# Altium PCB PCB1.PcbDoc
Units mil, origin at the board's own origin, x right, y up, seen from the top; angles counter-clockwise.
Board outline 2755.91 x 2519.69 mil, 4 copper layers (Top Layer, Layer 1, Layer 2, Bottom Layer), stack 23.756 mil thick; 56 components, 36 nets, 149 pads, 26 vias.
Unrouted connection lines stored in the file: 21.
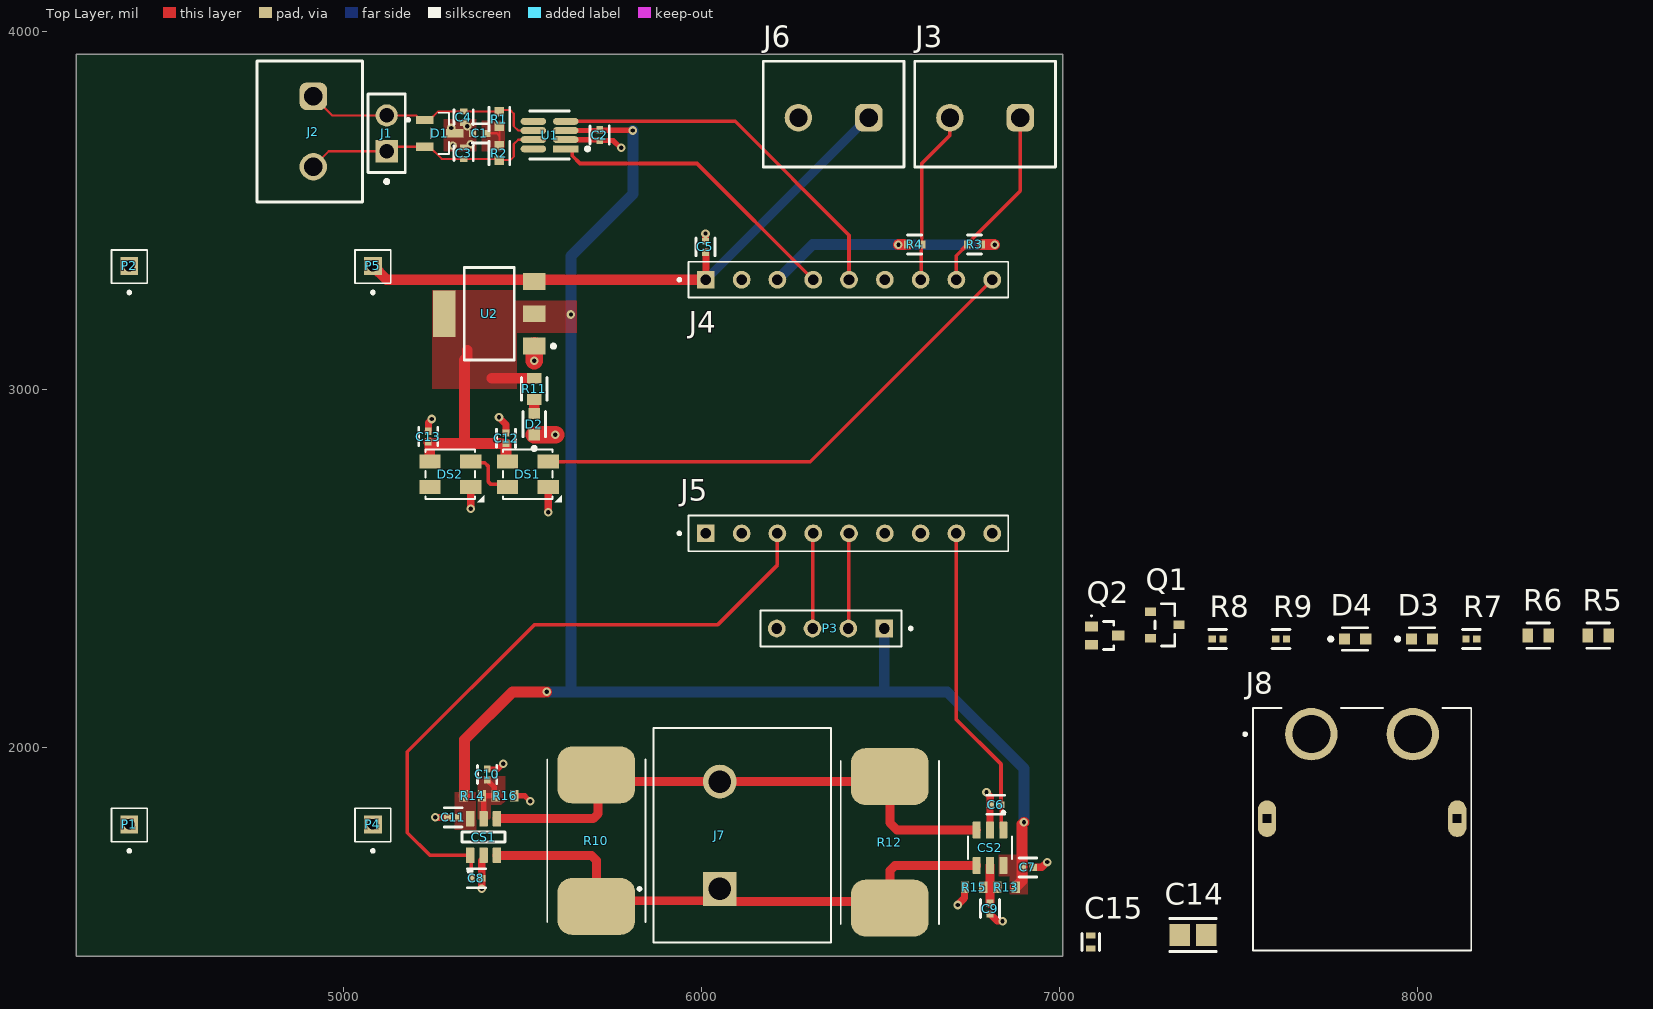
[diagram p0: Top Layer view]
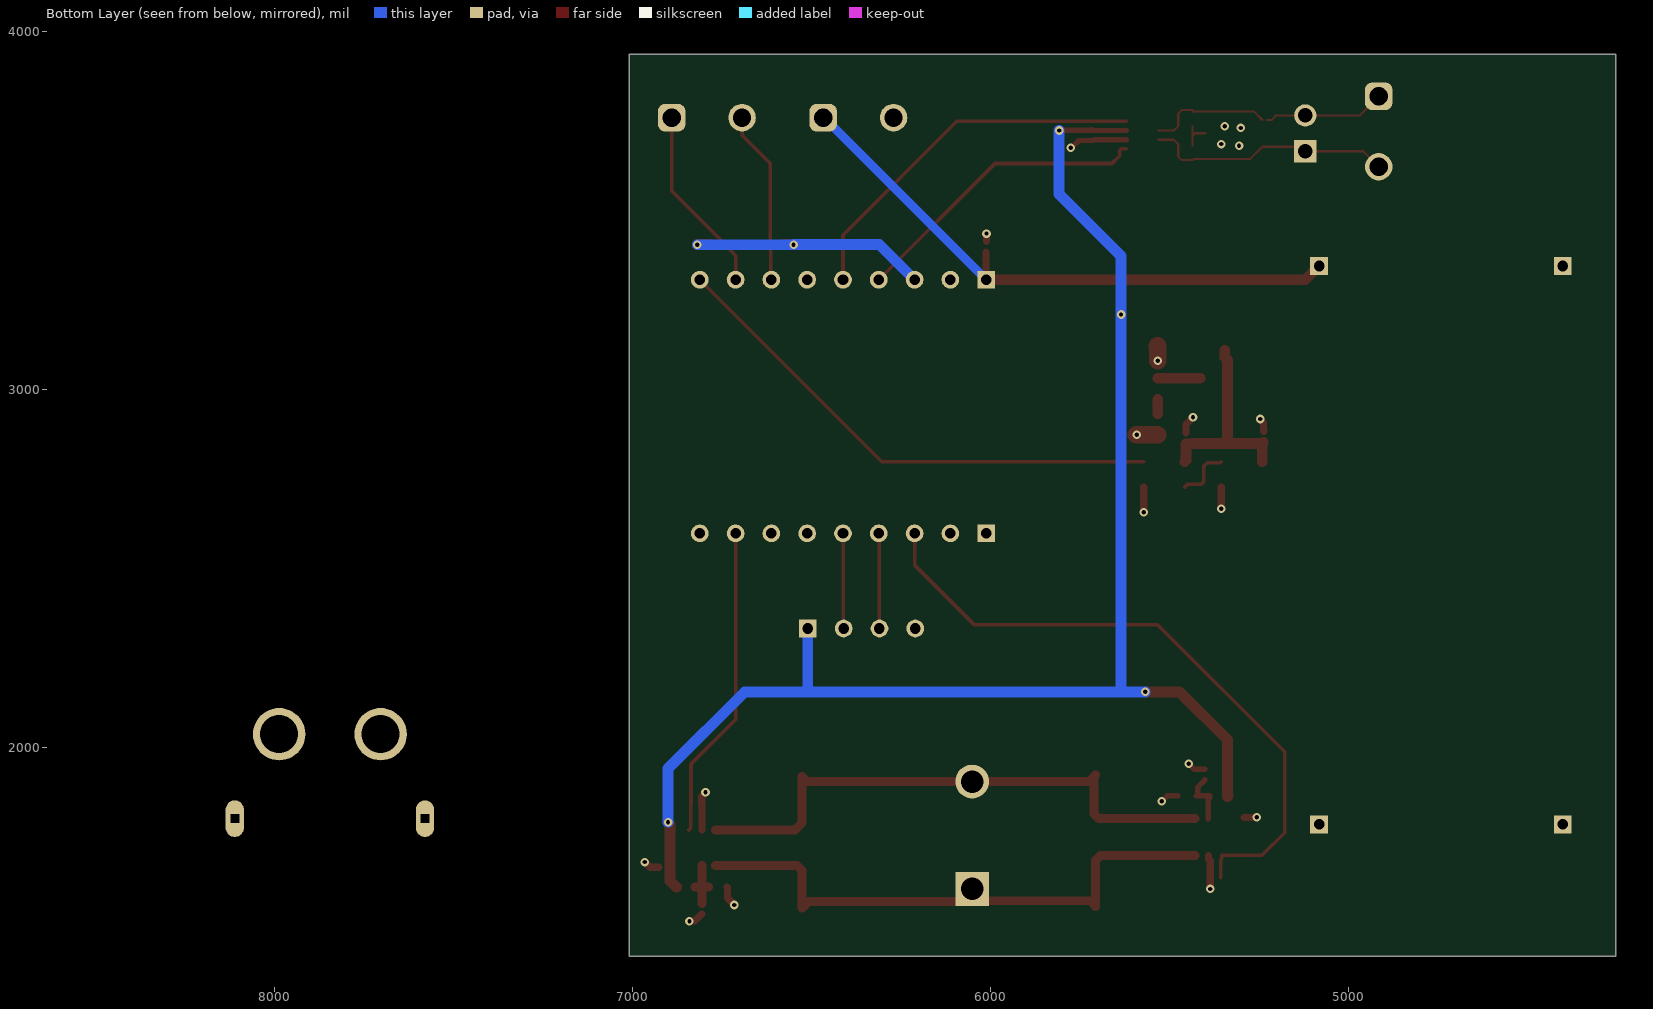
[diagram p1: Bottom Layer view, seen from below]
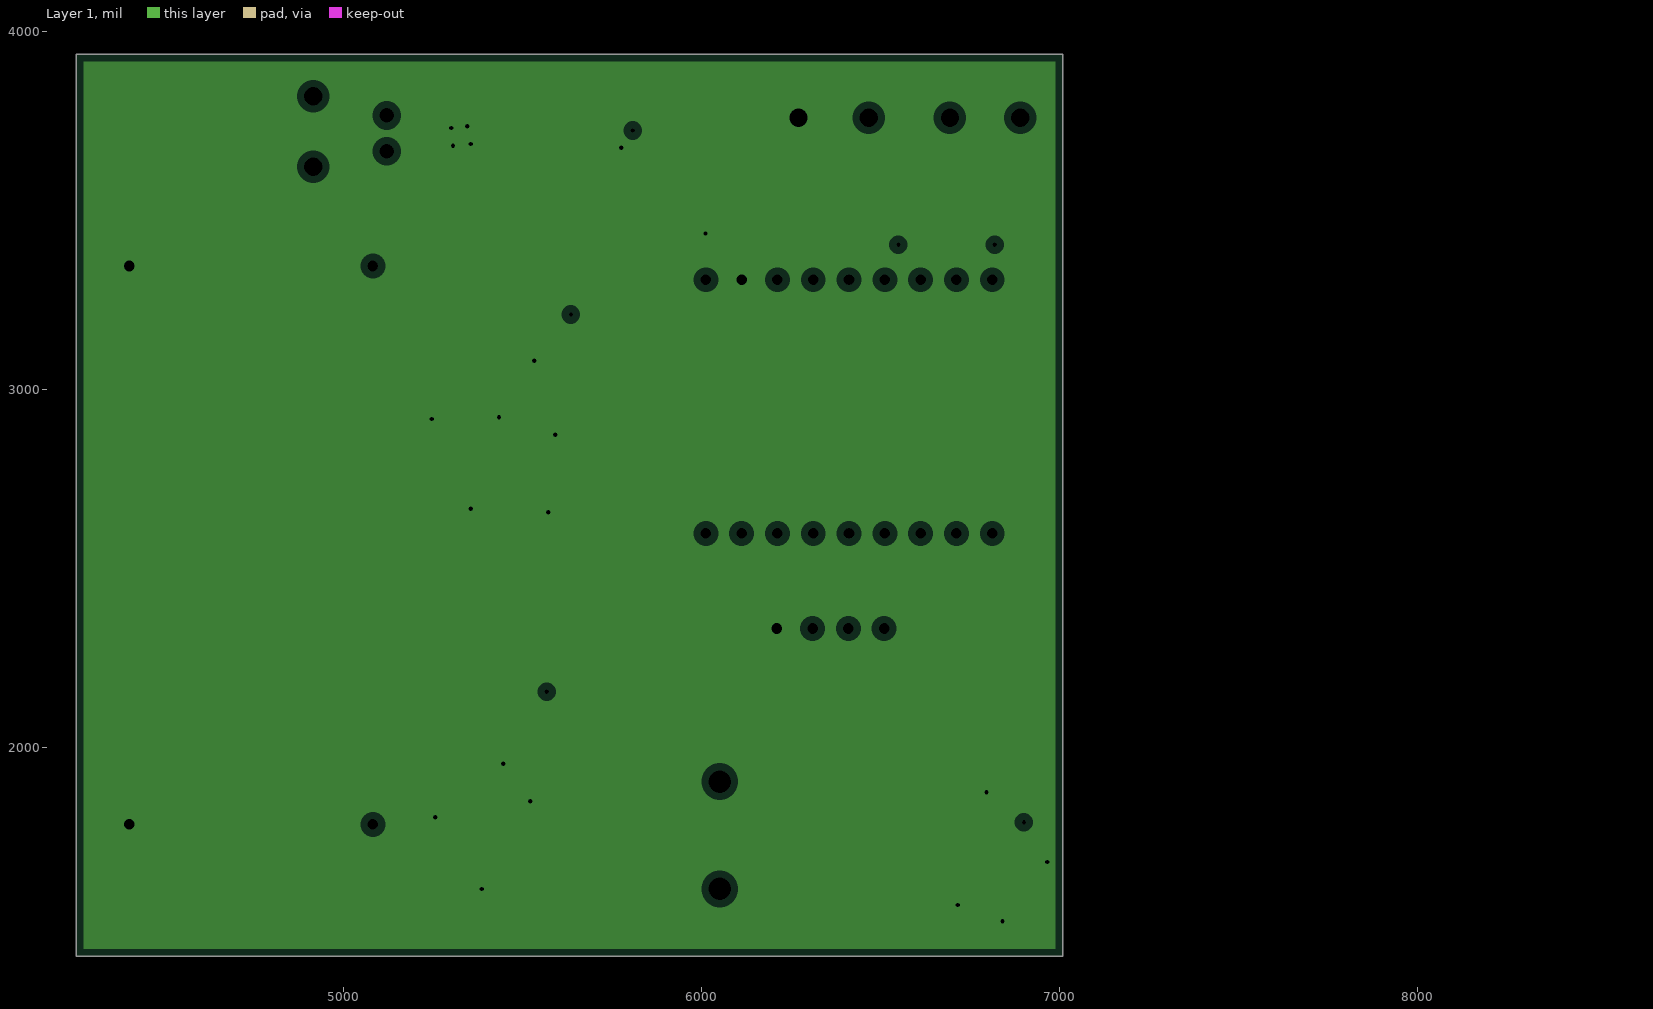
[diagram p2: Layer 1, clearances drawn from the general rule]
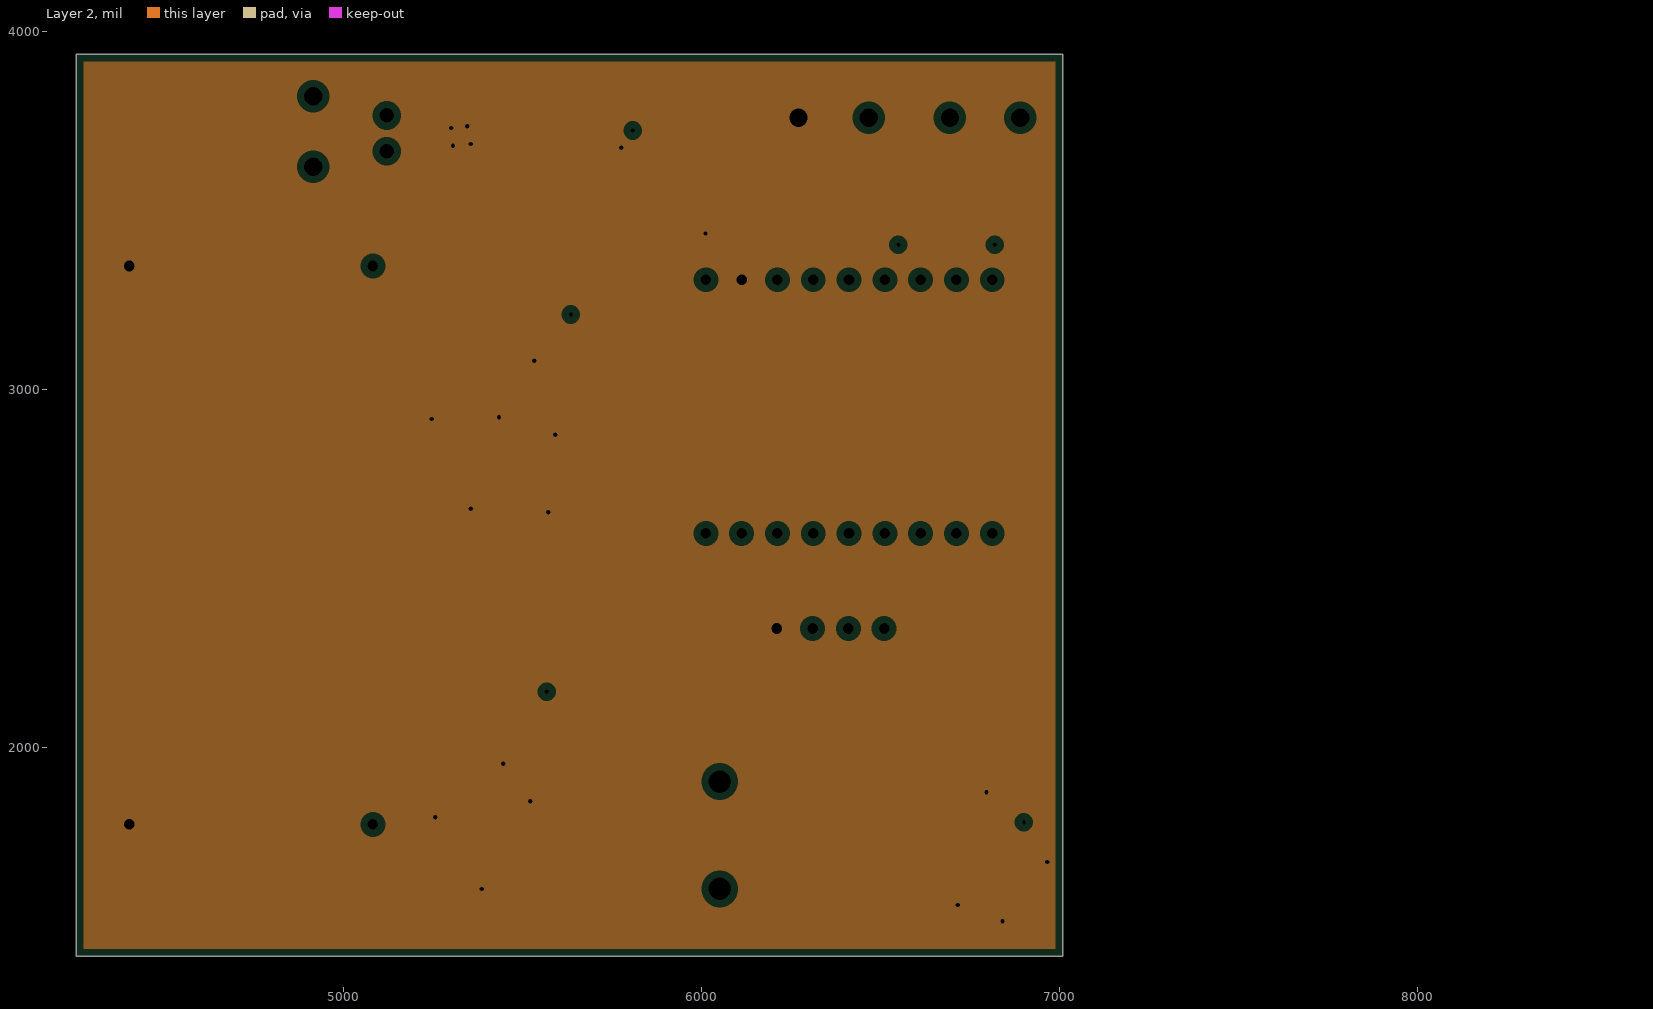
[diagram p3: Layer 2, clearances drawn from the general rule]

## Layer stack, top to bottom
Top Solder: solder mask 0.4, Solder Resist, Dk 3.5
Top Layer: signal copper 1.4
Dielectric 2: prepreg 2.8, PP-006, Dk 4.1
Layer 1: plane copper 1.378, net GND
Dielectric 1: dielectric 12.6, FR-4, Dk 4.8
Layer 2: plane copper 1.378, net GND
Dielectric 3: prepreg 2.8, PP-006, Dk 4.1
Bottom Layer: signal copper 1.4
Bottom Solder: solder mask 0.4, Solder Resist, Dk 3.5

## Board outline
4251.97,3937.01 4251.97,1417.32 7007.87,1417.32 7007.87,3937.01

## Design rules (kind name [scope] priority, off if disabled: settings)
Clearance [All] p1: gap=6 ignorepadtopadclearanceinfootprint=FALSE
DiffPairsRouting [All] p1: maxlimit=10 minlimit=10 mostfreqgap=10 toplayer_minwidth=5 toplayer_maxwidth=15 toplayer_prefwidth=15 bottomlayer_minwidth=15 bottomlayer_maxwidth=15 bottomlayer_prefwidth=15 maxuncoupledlength=500
PlaneClearance [All] p1: clearance=20
PlaneConnect [All] p1: pad.planeconnectstyle=Relief pad.reliefexpansion=20 pad.reliefentries=4 pad.reliefconductorwidth=10 pad.reliefairgap=10 via.planeconnectstyle=Direct via.reliefexpansion=20 via.reliefentries=4 via.reliefconductorwidth=10 via.reliefairgap=10
PolygonConnect [All] p1: connectstyle=Direct reliefconductorwidth=10 reliefentries=4 polygonreliefangle="90 Angle" airgapwidth=10
RoutingVias [All] p1: holewidth=12 width=24 viastyle="Through Hole" minholewidth=12 minwidth=24 maxholewidth=12 maxwidth=24
SolderMaskExpansion [All] p1: expansion=4 istentingtop=FALSE
SupplyNets "Schematic Supply Nets_5" [InNet('3V3_2')] p1: voltage=0.000
SupplyNets "Schematic Supply Nets_4" [InNet('GND')] p2: voltage=0.000
SupplyNets "Schematic Supply Nets_3" [InNet('3V3')] p3: voltage=0.000
SupplyNets "Schematic Supply Nets_2" [InNet('+5')] p4: voltage=0.000
SupplyNets "Schematic Supply Nets" [InNet('VIN')] p5: voltage=0.000
Width [All] p1: maxlimit=50 minlimit=6 preferedwidth=10
27 further rules are at their usual default settings.

## Classes and differential pairs
component class Sheet1: C12 C13 C14 C15 D2 DS1 DS2 J3 J6 J8 P1 P2 P4 P5 R3 R4 R11 U2 U3 U4
component class Sheet_1: C5 C6 C7 C8 C9 C10 C11 CS1 CS2 D3 D4 J4 J5 J7 P3 Q1 Q2 R12 R13 R14 R15 R16
component class CAN: C1 C2 C3 C4 D1 J1 J2 R1 R2 U1

## Components (designator, comment, footprint, x,y, rotation, side; value= is the part's Value field where it differs from the comment)
C1 "CC0402KRX7R6BB472" FP-CC0402-MFG 5379.33,3716.1 r0 top value="4.7 nF"
C2 "CL05B104KP5NNNC" FP-CL17-IPC_C 5714.33,3711.1 r90 top
C3 "CL05C101JB5NNNC" FP-CL05-MFG 5334.33,3660.45 r270 top value=100pF
C4 "CL05C101JB5NNNC" FP-CL05-MFG 5334.33,3761.1 r90 top value=100pF
C5 "CL05A104KA5NNNC" FP-CL278-IPC_C 6010,3399 r90 top
C6 "CL05A104KA5NNNC" FP-CL278-IPC_C 6820.59,1840 r180 top
C7 "CL05A104KA5NNNC" FP-CL278-IPC_C 6910.59,1665 r0 top
C8 "CL05A104KA5NNNC" FP-CL278-IPC_C 5370,1635 r0 top
C9 "CL05A104KA5NNNC" FP-CL278-IPC_C 6805,1550 r90 top
C10 "CL05A104KA5NNNC" FP-CL278-IPC_C 5400,1925 r270 top
C11 "CL05A104KA5NNNC" FP-CL278-IPC_C 5305,1805 r180 top
C12 "CL05A104KA5NNNC" FP-CL278-IPC_C 5452.76,2864.17 r270 top
C13 "CL05A104KA5NNNC" FP-CL278-IPC_C 5235.52,2868.81 r270 top
C14 "CL21A226MQQNNNE" FP-CL21-IPC_A 7372.03,1476.38 r0 top
C15 "CL05A106MP5NUNC" FP-CL05A106MP5NUNC-MFG 7086.6,1456.69 r90 top value=10uF
CS1 "INA181A1IDBVR" FP-DBV0006A-MFG 5390,1750 r90 top
CS2 "INA181A3IDBVR" SOT95P280X145-6N 6805,1720 r270 top
D1 "ESD2CAN24DBZRQ1" SOT95P237X112-3N 5267.8,3716.1 r0 top
D2 "VLMS1300-GS08" FP-6_541-5092_01-4-MFG 5531.5,2903.54 r90 top
D3 "VLMS1300-GS08" FP-6_541-5092_01-4-MFG 8011.8,2303.14 r0 top
D4 "VLMS1300-GS08" FP-6_541-5092_01-4-MFG 7824.79,2303.14 r0 top
DS1 "SK6812MINI-HS" LED 5511.81,2765.75 r0 top
DS2 "SK6812MINI-HS" LED 5295.28,2765.75 r0 top
J1 "M20-9990246" FP-M20-9990246-MFG 5119.33,3716.1 r90 top
J2 "691137710002" 691137710002 4904.33,3721.1 r270 top
J3 "691137710002" 691137710002 6791.34,3769.68 r180 top
J4 "2PH1-09-UA" "2AMPHENOL_76341-322LF - duplicate" 7061.02,3307.09 r180 top locked
J5 "2PH1-09-UA" "2AMPHENOL_76341-322LF - duplicate" 7061.02,2598.43 r180 top locked
J6 "691137710002" 691137710002 6368.11,3769.68 r180 top
J7 "TB005-762-02BE" CUI_TB005-762-02BE 6050,1605 r90 top
J8 "XT60PW-F" AMASS_XT60PW-F 7844.47,2037.4 r0 top
P1 "Header-Male-2.54_1x1" PCBCOMPONENT_1 4400.26,1785.24 r270 top
P2 "Header-Male-2.54_1x1" PCBCOMPONENT_1 4400.26,3345.47 r270 top
P3 "Header-Female-2.54_1x4" "4 PIN CONNECTOR MALE" 5609.06,2177.68 r0 top
P4 "Header-Male-2.54_1x1" PCBCOMPONENT_1 5080.83,1785.24 r270 top
P5 "Header-Male-2.54_1x1" PCBCOMPONENT_1 5080.83,3345.47 r270 top
Q1 "SS8050-G" FP-SS8050-G-MFG 7293.29,2342.51 r0 top
Q2 "SMMBT3906WT1G" ONSC-SC-70-3-419-04_V 7125.97,2312.99 r0 top
R1 "ERJ-2RKF60R4X" FP-ERJ2RK-IPC_A 5434.33,3756.1 r270 top
R2 "ERJ-2RKF60R4X" FP-ERJ2RK-IPC_A 5434.33,3661.1 r90 top
R3 "RC0402JR-074K7L" FP-RC0402-0_4-MFG 6761.81,3405.51 r0 top
R4 "RC0402JR-074K7L" FP-RC0402-0_4-MFG 6594.49,3405.51 r180 top
R5 "CRCW06031K00FKEA" FP-CRCW0603-e3-MFG 8503.92,2312.99 r0 top value=1kR
R6 "CRCW06031K00FKEA" FP-CRCW0603-e3-MFG 8336.6,2312.99 r0 top value=1kR
R7 "RC0402JR-0710KL" FP-RC0402-0_4-IPC_C 8149.59,2303.14 r0 top
R8 "RC0402JR-0710KL" FP-RC0402-0_4-IPC_C 7440.93,2303.14 r0 top
R9 "RC0402JR-0710KL" FP-RC0402-0_4-IPC_C 7618.1,2303.14 r0 top
R10 "WSR32L000FEA" RESM11569X253N 5705,1740 r90 top value=2mR
R11 "CRCW06031K00FKEA" FP-CRCW0603-e3-MFG 5531.5,3001.97 r90 top value=1kR
R12 "WSR32L000FEA" RESM11569X253N 6525,1735 r90 top value=2mR
R13 "RC0603FR-1010KL" RESC1608X55X25LL10T15 6850.59,1610 r0 top
R14 "RC0603FR-1010KL" RESC1608X55X25LL10T15 5360,1865 r180 top
R15 "RC0603FR-1010KL" RESC1608X55X25LL10T15 6760.59,1610 r0 top
R16 "RC0603FR-1010KL" RESC1608X55X25LL10T15 5450,1865 r180 top
U1 "TCAN332GDCNR" FP-DCN0008A-IPC_A 5574.33,3711.1 r180 top
U2 "AZ1117CH-3.3TRG1" FP-SOT223-MFG 5406,3212 r180 top

## Footprints (in the part's own frame and the unit in brackets; to place one, negate y for a bottom-side part, rotate by r counter-clockwise, add the part's x,y. Pads: shape width x height; smd on the part's side, far side on the other; paste and mask are expansions set on the pad)
"2AMPHENOL_76341-322LF - duplicate" [mm]
  rect 1.258x1.258 / inner round 1.258 / far side rect 1.258x1.258 hole 0.75: 1(26.67,0)
  round 1.258 hole 0.75: 2(24.13,0) 3(21.59,0) 4(19.05,0) 5(16.51,0) 6(13.97,0) 7(11.43,0) 8(8.89,0) 9(6.35,0)
  silkscreen extent 5.21,-1.27 28.65,1.27
"4 PIN CONNECTOR MALE" [mil]
  rect 49.53x49.53 / inner round 49.53 / far side rect 49.53x49.53 hole 29.53: 1(900,155)
  round 49.53 hole 29.53: 2(800,155) 3(700,155) 4(600,155)
  silkscreen extent 555,105 978,205
691137710002 [mm] "Horizontal Cable Entry with Pressure Clamp, pitch 5mm, 02p"
  rrect50% 1.95x1.95 hole 1.3: 1(-2.5,0.25)
  round 1.95 hole 1.3: 2(2.5,0.25)
  silkscreen extent -5,-3.75 5,3.75, body extent -5,-3.75 5,3.75, height 11.6
AMASS_XT60PW-F [mm]
  round 3.716 hole 2.7: 1(-3.6,0) 2(3.6,0)
  oval 1.3x2.6 hole 0.6 square: S1(-6.75,-6) S2(6.75,-6)
  silkscreen extent -8.4,-15.35 7.75,1.85, body extent -7.75,-15.35 7.75,1.85, height 8.4
CUI_TB005-762-02BE [mm]
  rect 2.4x2.4 / inner round 2.4 / far side rect 2.4x2.4 hole 1.6: 1(0,0)
  round 2.4 hole 1.6: 2(7.62,0)
  silkscreen extent -3.81,-7.9 11.43,5.8, body extent -4.32,-7.7 11.52,4.9, height 21.7
FP-6_541-5092_01-4-MFG [mm]
  rect 0.8x0.8 smd paste+0 mask+0: 1(-0.75,0) 2(0.75,0)
  silkscreen extent -1.85,-0.8 0.9,0.8, body extent -1.25,-0.6 1.25,0.6, height 0.25
FP-CC0402-MFG [mm]
  rect 0.5x0.5 smd paste+0 mask+0: 1(-0.5,0) 2(0.5,0)
  silkscreen extent -0.53,-0.68 0.53,0.67, body extent -0.87,-0.48 0.87,0.48, height 0.25
FP-CL05-MFG [mm]
  rect 0.42x0.525 smd paste+0 mask+0: 1(-0.397,0) 2(0.397,0)
  silkscreen extent -0.53,-0.67 0.53,0.67, body extent -0.71,-0.38 0.71,0.38, height 0.25
FP-CL05A106MP5NUNC-MFG [mm]
  rect 0.45x0.675 smd paste+0 mask+0: 1(-0.463,0) 2(0.463,0)
  silkscreen extent -0.6,-0.63 0.6,0.63, body extent -0.79,-0.45 0.79,0.45, height 0.25
FP-CL17-IPC_C [mil]
  rect 20.29x18.6 smd paste+0 mask+0: 1(-14.9,0) 2(14.9,0)
  silkscreen extent -25,-27 25,27, body extent -29,-15 29,15, height 10
FP-CL21-IPC_A [mil]
  rect 57.27x61.27 smd paste+0 mask+0: 1(-36.45,0) 2(36.45,0)
  silkscreen extent -65,-46 65,46, body extent -85,-50 85,50, height 10
FP-CL278-IPC_C [mil]
  rect 20.29x18.6 smd paste+0 mask+0: 1(-14.9,0) 2(14.9,0)
  silkscreen extent -25,-27 25,27, body extent -29,-15 29,15, height 10
FP-CRCW0603-e3-MFG [mm]
  rect 0.75x1 smd paste+0 mask+0: 1(-0.75,0) 2(0.75,0)
  silkscreen extent -0.8,-0.9 0.8,0.9, body extent -1.22,-0.6 1.22,0.6, height 0.25
FP-DBV0006A-MFG [mm]
  rrect17% 1.1x0.6 smd paste+0 mask+0: 1(-1.3,0.95) 2(-1.3,0) 3(-1.3,-0.95) 4(1.3,-0.95) 5(1.3,0) 6(1.3,0.95)
  silkscreen extent -2.52,-1.53 0.35,1.53, body extent -1.95,-1.78 1.95,1.78, height 0.25
FP-DCN0008A-IPC_A [mm]
  rect 1.805x0.495 smd paste+0 mask+0: 1(-1.15,0.975)
  rrect100% 1.805x0.495 smd paste+0 mask+0: 2(-1.15,0.325) 3(-1.15,-0.325) 4(-1.15,-0.975) 5(1.15,-0.975) 6(1.15,-0.325) 7(1.15,0.325) 8(1.15,0.975)
  silkscreen extent -2.83,-1.7 1.4,1.7, body extent -2.55,-1.95 2.55,1.95, height 0.25
FP-ERJ2RK-IPC_A [mil]
  rect 26.31x26.48 smd paste+0 mask+0: 1(-19.77,0) 2(19.77,0)
  silkscreen extent -33,-29 33,29, body extent -41,-21 41,21, height 10
FP-M20-9990246-MFG [mm]
  rect 1.57x1.57 hole 1.02 paste-2539.97 mask+0: 1(-1.27,0)
  round 1.57 hole 1.02 paste-2539.97 mask+0: 2(1.27,0)
  silkscreen extent -3.55,-1.32 2.79,1.32, body extent -2.89,-1.42 2.89,1.42, height 0.25
FP-RC0402-0_4-IPC_C [mil]
  rect 20.29x18.6 smd paste+0 mask+0: 1(-14.9,0) 2(14.9,0)
  silkscreen extent -25,-27 25,27, body extent -29,-15 29,15, height 10
FP-RC0402-0_4-MFG [mm]
  rect 0.5x0.6 smd paste+0 mask+0: 1(-0.5,0) 2(0.5,0)
  silkscreen extent -0.5,-0.67 0.5,0.67, body extent -0.85,-0.4 0.85,0.4, height 0.25
FP-SOT223-MFG [mm]
  rect 1.6x1.2 smd paste+0 mask+0: 1(-3.2,2.3) 2(-3.2,0) 3(-3.2,-2.3)
  rect 1.6x3.3 smd paste+0 mask+0: 4(3.2,0)
  silkscreen extent -4.68,-3.27 1.78,3.27, body extent -4.1,-3.37 4.1,3.37, height 0.25
FP-SS8050-G-MFG [mm]
  rect 0.8x0.6 smd paste+0 mask+0: 1(-1.01,0.95) 2(-1.01,-0.95) 3(1.01,0)
  silkscreen extent -0.7,-1.5 0.7,1.5, body extent -1.51,-1.6 1.51,1.6, height 0.25
LED [mm]
  rect 1.5x1 smd: 1(1.491,-0.96) 2(1.491,0.841) 3(-1.409,0.841) 4(-1.409,-0.96)
  silkscreen extent -1.71,-2.03 2.46,1.69, body extent -1.72,-1.8 1.98,1.7, height 1
ONSC-SC-70-3-419-04_V [mm] "SOT23, 3-Leads, Body 2x1.25mm, Pitch 0.65mm"
  rect 0.9x0.7 smd: 1(-0.95,0.65) 2(-0.95,-0.65) 3(0.95,0)
  silkscreen extent -1,-1 0.63,1.45, body extent -0.63,-1 0.63,1, height 1
PCBCOMPONENT_1 [mm]
  rect 1.258x1.258 / inner round 1.258 / far side rect 1.258x1.258 hole 0.75: 1(0,0)
  silkscreen extent -1.14,-1.27 1.98,1.27
RESC1608X55X25LL10T15 [mm] "Chip Resistor, 2-Leads, Body 1.60x0.80mm, IPC High Density"
  rect 0.6x0.8 smd: 1(-0.65,0) 2(0.65,0)
  body extent -0.85,-0.45 0.85,0.45, height 0.55
RESM11569X253N [mm]
  rrect50% 4.04x5.51 smd: 1(-4.665,0) 2(4.665,0)
  silkscreen extent -5.78,-3.49 5.78,3.49, body extent -5.78,-3.56 5.78,3.42, height 2.42
SOT95P237X112-3N [mm]
  rect 1.24x0.59 smd: 1(-1.055,0.95) 2(-1.055,-0.95) 3(1.055,0)
  silkscreen extent -2.35,-1.46 0.65,1.46, body extent -1.18,-1.46 1.18,1.46, height 1.12
SOT95P280X145-6N [mm]
  rrect25% 1.21x0.58 smd: 1(-1.255,0.95) 2(-1.255,0) 3(-1.255,-0.95) 4(1.255,-0.95) 5(1.255,0) 6(1.255,0.95)
  silkscreen extent -2.6,-1.56 0.8,1.56, body extent -1.4,-1.45 1.4,1.45, height 1.45

## Part data
C1: library part CMP-03422-001343-1, "CC0402 4.7 nF X7R 10.00% 10 V", Capacitance="4.7 nF", Manufacturer=YAGEO, Package=CC0402, Temperature="-55°C to +125°C", Temperature Characteristic=X7R, Temperature Coefficient=30ppm/°C, Temperature Range High=+125°C, Temperature Range Low=-55°C, Tolerance=0.1, Voltage Rating="10 V", Automotive=No, Automotive Grade=NA, Category=Cap, ComponentLink2Description=Datasheet, ComponentLink2URL=http://www.yageo.com/documents/recent/UPY-GP_NP0_16V-to-50V_16.pdf, Device Class L1="Passive Components", Device Class L2=Capacitors, Device Class L3="Ceramic Capacitors", Footprint Url=http://www.yageo.com/exep/pages/download/literatures/UPY-C_GEN_24.pdf, Height=0.55mm, Ipc Land Pattern Name=CAPC10050X50, Lead Free=Yes, Manufacturer Part Number=CC0402KRX7R6BB472, Material=Ceramic, Mouser Description="Cap Ceramic 0.0047uF 10V X7R 10% SMD 0402 125°C Paper T/R", Octopart=https://octopart.com/cc0402krx7r6bb472-yageo-90326733, RoHS=TRUE
C2: library part CMP-13271-001069-1, "Cap Ceramic 100nF 10V X7R ±10% SMD 0402 +125°C Paper T/R", Capacitance=100nF, Case Code (Imperial)=0402, Case Code (Metric)=1005, Dielectric=X7R, Max Operating Temperature=125°C, Min Operating Temperature=-55°C, Package Quantity=1, Tolerance=10%, Voltage Rating=10V, Case/Package=0402, Contact Plating=Tin, Depth=0.5mm, Height=0.5mm, Length=1mm, Mount="Surface Mount", Packaging="Tape and Reel", Radiation Hardening=No, Thickness=0.022inch, Width=0.02inch
C3 C4: library part CMP-13271-000010-1, "CAP CER 100PF 50V C0G/NP0 0402", Capacitance=100pF, Manufacturer=Samsung, Package=CL05, Temperature="-55°C to +125°C", Temperature Characteristic=C0G, Temperature Coefficient=30ppm/°C, Temperature Range High=+125°C, Temperature Range Low=-55°C, Tolerance=5%, Voltage Rating=50V, Automotive=No, Category=Cap, ComponentLink2Description=Datasheet, ComponentLink2URL=http://www.samsungsem.com/global/front/downloadcms.do?path=%2F%2Fglobal%2F%2Fsupport%2F%2Fproduct-search%2F%2Fmlcc%2F%2F__icsFiles%2F%2Fafieldfile%2F%2F2019%2F%2F06%2F%2F18&fileName=CL05C101JB5NNNC-19.pdf, Device Class L1="Passive Components", Device Class L2=Capacitors, Device Class L3="Ceramic Capacitors", Digikey Description="CAP CER 100PF 50V C0G/NP0 0402", Height=0.55mm, Ipc Land Pattern Name=CAPC10050X50, Lead Free=Yes, Manufacturer Part Number=CL05C101JB5NNNC, Material=Ceramic, Octopart=https://octopart.com/cl05c101jb5nnnc-samsung-9299367, RoHS=TRUE
C5 C6 C7 C8 C9 C10 C11 C12 C13: library part CMP-13271-000728-1, "Cap Ceramic 100nF 25V X5R ±10% SMD 0402 +85°C Paper T/R", Capacitance=100nF, Case Code (Imperial)=0402, Case Code (Metric)=1005, Dielectric=X5R, Max Operating Temperature=85°C, Min Operating Temperature=-55°C, Package Quantity=1, Tolerance=10%, Voltage=25V, Case/Package=0402, Depth=0.5mm, Height=0.5mm, Lead Free="Lead Free", Length=1mm, Mount="Surface Mount", Packaging="Tape and Reel", Radiation Hardening=No, Thickness=0.022inch, Voltage Rating=25V, Voltage Rating (DC)=25V, Width=0.02inch
C14: library part CMP-13271-000185-1, "CL21 Series 0805 22uF 6.3V ±20% Tolerance X5R Multilayer Ceramic Chip Capacitor", Capacitance=22uF, Case Code (Imperial)=0805, Case Code (Metric)=2012, Dielectric=X5R, Max Operating Temperature=85°C, Min Operating Temperature=-55°C, Package Quantity=2000, Tolerance=20%, Voltage Rating=6.3V, Case/Package=0805, Contact Plating=Tin, Depth=1.25mm, Height=1.25mm, Lead Free="Lead Free", Length=2mm, Mount="Surface Mount", Packaging="Tape and Reel", Radiation Hardening=No, Thickness=0.055inch, Voltage Rating (DC)=6.3V, Width=0.049inch
C15: library part CMP-13271-000002-1, "CAP CER 10UF 10V X5R 0402", Capacitance=10uF, Manufacturer=Samsung, Temperature="-55°C to +85°C", Temperature Characteristic=X5R, Temperature Coefficient=15%, Temperature Range High=+85°C, Temperature Range Low=-55°C, Tolerance=20%, Voltage Rating=10V, Automotive=No, Category=Cap, ComponentLink2Description=Datasheet, ComponentLink2URL=http://www.samsungsem.com/kr/support/product-search/mlcc/__icsFiles/afieldfile/2019/05/10/19-CL05A106MP5NUNC.pdf, Device Class L1="Passive Components", Device Class L2=Capacitors, Device Class L3="Ceramic Capacitors", Digikey Description="CAP CER 10UF 10V X5R 0402", Height=0.7mm, Ipc Land Pattern Name=CAPC10050X50, Lead Free=Yes, Manufacturer Part Number=CL05A106MP5NUNC, Material=Ceramic, Octopart=https://octopart.com/cl05a106mp5nunc-samsung-22457395, Package=CL05A106MP5NUNC, RoHS=TRUE
CS1: library part CMP-04895-000055-1, "IC CURR SENSE 1 CIRCUIT SOT23-6", Ambient Temperature Range High=+125°C, Ambient Temperature Range Low=-40°C, Input Bias Current=75uA, Input Offset Voltage=0.1mV, Manufacturer="Texas Instruments", Max Junction Temp=+150°C, Max Supply Voltage=5.5V, Min Supply Voltage=2.7V, Nominal Supply Current=195uA, Output Current Per Channel=8mA, Package=DBV0006A, Temperature="-40°C to +125°C", Voltage Gain=0.02V/mV, Automotive=No, Bandwidth=350kHz, Category=IC, ComponentLink2Description=Datasheet, ComponentLink2URL=http://www.ti.com/lit/ds/symlink/ina181.pdf, Device Class L1="Integrated Circuits (ICs)", Device Class L2="Linear ICs", Device Class L3=Instrumentation, Digikey Description="IC CURR SENSE 1 CIRCUIT SOT23-6", Height=1.45mm, Lead Free=Yes, Manufacturer Part Number=INA181A1IDBVR, Mouser Description="26V bi-directional current sense amplifier for cost-sensitive systems 6-SOT-23 -40 to 125", Number of Channels=1, Octopart=https://octopart.com/ina181a1idbvr-texas+instruments-81856289, RoHS=TRUE, Standoff Height=0mm, Temperature Range High=+125°C, Temperature Range Low=-40°C
CS2: "Operational Amplifier, 1 Func, 500uV Offset-Max, PDSO6", Average Bias Current-Max (IIB)=75uA, Case/Package=SOP, Input Offset Voltage-Max=500uV, Manufacturer="Texas Instruments", Max Operating Temperature=125°C, Min Operating Temperature=-40°C, Nominal Supply Voltage=5V, Package Body Material=Plastic, Package Shape=Rectangular, Package Style="SMALL OUTLINEMeter", Peak Reflow Temperature (Cel)=260°C, Supplier Part Number=296-47658-1-ND, Supply Voltage Limit-Max=5.5V, Temperature Grade=AUTOMOTIVE, Amplifier Type="OPERATIONAL AMPLIFIER", Category="Amplifiers - Op Amps, Buffer, Instrumentation", Channels=1, Common-mode Reject Ratio-Nom=100dB, ComponentLink1Description=https://www.ti.com:443/lit/ds/symlink/ina181.pdf?src-supplier=IHS+Markit, ComponentLink1URL=https://www.ti.com:443/lit/ds/symlink/ina181.pdf?src-supplier=IHS+Markit, ComponentLink2Description=http://www.ti.com/lit/ds/symlink/ina181.pdf?src-supplier=Digikey, ComponentLink2URL=http://www.ti.com/lit/ds/symlink/ina181.pdf?src-supplier=Digikey, JESD-30 Code=R-PDSO-G6, JESD-609 Code=e3, Manufacturer Part Number=INA181A3IDBVR, Moisture Sensitivity Level=1, Pins=6, Pricing="1=0.43, 10=0.297, 25=0.2652, 100=0.2296, 250=0.21268, 500=0.20246, 1000=0.19404 (USD)", Reach SVHC Compliant=Yes, RoHS=Yes, RoHS Compliant=Yes, Slew Rate=2V/µs, Stock=8886, Supplier=Digikey, Surface Mount=Yes, Terminal Finish=Tin, Terminal Form="Gull Wing", Terminal Position=DUAL, Unity Gain BW-Nom=350kHz
D1: "Automotive, dual, 3-pF, ±24-V, ±30-kV ESD protection diode for CAN and in-vehicle networks 3-SOT-23 -55 to 150", Manufacturer="Texas Instruments", Supplier Part Number=296-ESD2CAN24DBZRQ1CT-ND, Category="Integrated Circuits (ICs)", Manufacturer Part Number=ESD2CAN24DBZRQ1, Pricing="1=0.22, 10=0.149, 25=0.1316, 100=0.1125, 250=0.10328, 500=0.09774, 1000=0.09319 (USD)", RoHS=No, Stock=12405, Supplier=Digikey
D2 D3 D4: library part CMP-02520-000012-1, "LED RED 0603 SMD", Ambient Temperature Range High=+85°C, Ambient Temperature Range Low=-35°C, Colour=Red, Forward Current=20mA, Forward Voltage=2V, Manufacturer=Vishay, Package=6.541-5092.01-4, Power Dissipation=75mW, Reverse Voltage=5V, Temperature="-35°C to +85°C", Automotive=No, Category=Diode, ComponentLink2Description=Datasheet, ComponentLink2URL=http://www.vishay.com/docs/82437/vlmo1300.pdf, Device Class L1=Optoelectronics, Device Class L2=LEDs, Device Class L3=unset, Digikey Description="LED RED 0603 SMD", Height=1mm, Lead Free=Yes, Led Orientation="Top View", Luminous Intensity=54mcd, Manufacturer Part Number=VLMS1300-GS08, Mouser Description="Standard LEDs - SMD Super Red Clear Non-Diff", Octopart=https://octopart.com/vlms1300-gs08-vishay-21709201, Peak Emmision Wavelength=639nm, RoHS=TRUE, Temperature Range High=+85°C, Temperature Range Low=-35°C, Viewing Angle=130°, Wavelength=631nm
J1: library part CMP-15831-000009-1, "CONN HEADER VERT 2POS 2.54MM", Current Rating=3A, Manufacturer=Harwin, Temperature="-40°C to +105°C", Temperature Range High=+105°C, Temperature Range Low=-40°C, Automotive=No, Category=Conn, ComponentLink2Description=Datasheet, ComponentLink2URL=https://cdn.harwin.com/pdfs/M20-999.pdf, Conn Gender=Male, Conn Orientation=Vertical, Contact Material=Tin,Nickel, Device Class L1=Connectors, Device Class L2="Headers and Wire Housings", Device Class L3=unset, Digikey Description="CONN HEADER VERT 2POS 2.54MM", Height=8.99mm, Lead Free=Yes, Manufacturer Part Number=M20-9990246, Mouser Description="2.54mm (0.1\") Pitch SIL Vertical PC Tail Pin Header, 6.1mm mating pin height, tin, 2 contacts", Number of Contacts=2, Number of Rows=1, Octopart=https://octopart.com/m20-9990246-harwin-2590635, Package=M20-9990246, Pitch=2.54mm, RoHS=TRUE
J2 J3 J6: library part CMP-1502-03324-2, Current Rating=16A, Max Operating Temperature=120°C, Min Operating Temperature=-30°C, Voltage Rating=300V, Contact Material="Nickel, Tin", Height=11.6mm, Lead Pitch=5mm, NexarPartId=78871135, Number of Contacts=2, Number of Pins=2, Number of Rows=1, Packaging=Box, RoHS=Non-Compliant
J4 J5: "Conn Unshrouded Header HDR 9 POS 2mm Solder ST Thru-Hole", Contact Resistance=20mΩ, Current Rating=1A, Insulation Resistance=5GΩ, Manufacturer="Adam Tech", Max Operating Temperature=105°C, Min Operating Temperature=-55°C, Supplier Part Number=2057-2PH1-09-UA-ND, Category="Card Edge Connectors", ComponentLink1Description=https://datasheet.octopart.com:443/2PH1-09-UA-Adam-Tech-datasheet-21182828.pdf?src-supplier=IHS, ComponentLink1URL=https://datasheet.octopart.com:443/2PH1-09-UA-Adam-Tech-datasheet-21182828.pdf?src-supplier=IHS, ComponentLink2Description=https://datasheet.octopart.com:443/2PH1-09-UA-Adam-Tech-datasheet-12511781.pdf?src-supplier=Future+Electronics, ComponentLink2URL=https://datasheet.octopart.com:443/2PH1-09-UA-Adam-Tech-datasheet-12511781.pdf?src-supplier=Future+Electronics, ComponentLink3Description=http://sigma.octopart.com:80/rohs_statement/Adam-Tech-company-22.pdf?src-supplier=Compliance+Statements, ComponentLink3URL=http://sigma.octopart.com:80/rohs_statement/Adam-Tech-company-22.pdf?src-supplier=Compliance+Statements, ComponentLink4Description=http://sigma.octopart.com:80/reach_statement/Adam-Tech-company-23.pdf?src-supplier=Compliance+Statements, ComponentLink4URL=http://sigma.octopart.com:80/reach_statement/Adam-Tech-company-23.pdf?src-supplier=Compliance+Statements, Contact Gender=Male, Contact Material=Brass, Lead Free="Lead Free", Lifecycle Status=Production, Manufacturer Part Number=2PH1-09-UA, Number of Rows=1, Pins=9, Pricing="1=0.17, 10=0.141, 100=0.1195, 500=0.1066, 1000=0.10151, 5000=0.0906, 10000=0.08627 (USD)", REACH SVHC=Yes, RoHS=Compliant, Stock=1766, Supplier=DigiKey, Terminal Pitch=2mm
J7: "Barrier Strip Terminal Block", Manufacturer="Same Sky", Supplier Part Number=102-6189-ND, Category="Terminal Blocks", ComponentLink1Description=https://www.cuidevices.com/product/resource/digikeypdf/tb005-762.pdf?src-supplier=Digikey, ComponentLink1URL=https://www.cuidevices.com/product/resource/digikeypdf/tb005-762.pdf?src-supplier=Digikey, ComponentLink2Description=https://datasheet.octopart.com/TB005-762-02BE-Same-Sky-datasheet-182050252.pdf?src-supplier=Future+Electronics, ComponentLink2URL=https://datasheet.octopart.com/TB005-762-02BE-Same-Sky-datasheet-182050252.pdf?src-supplier=Future+Electronics, ComponentLink3Description=https://datasheet.octopart.com/TB005-762-02BE-CUI-Devices-datasheet-142371921.pdf?src-supplier=Future+Electronics, ComponentLink3URL=https://datasheet.octopart.com/TB005-762-02BE-CUI-Devices-datasheet-142371921.pdf?src-supplier=Future+Electronics, ComponentLink4Description=https://datasheet.octopart.com/TB005-762-02BE-Same-Sky-datasheet-182881445.pdf?src-supplier=Electro+Sonic, ComponentLink4URL=https://datasheet.octopart.com/TB005-762-02BE-Same-Sky-datasheet-182881445.pdf?src-supplier=Electro+Sonic, ComponentLink5Description=https://datasheet.octopart.com/TB005-762-02BE-Same-Sky-datasheet-189105715.pdf?src-supplier=Master+Electronics, ComponentLink5URL=https://datasheet.octopart.com/TB005-762-02BE-Same-Sky-datasheet-189105715.pdf?src-supplier=Master+Electronics, Manufacturer Part Number=TB005-762-02BE, Pricing="1=0.78, 10=0.574, 25=0.5, 50=0.4504, 100=0.4073, 250=0.36028, 600=0.3253, 1200=0.30358, 5400=0.27068 (USD)", RoHS=Yes, Stock=4809, Supplier=Digikey
J8: "Socket DC Supply Connector Female", Package=Package, Availability="Not in stock", Check_prices=https://www.snapeda.com/parts/XT60PW-F/AMASS/view-part/?ref=eda, MF=AMASS, MP=XT60PW-F, Price=None, SnapEDA_Link=https://www.snapeda.com/parts/XT60PW-F/AMASS/view-part/?ref=snap
P1 P2 P4 P5: JLCPCB Part Class="Extended Part", Manufacturer=BOOMELE(博穆精密), Manufacturer Part=2.54-1*1P针, spicePre=P, spiceSymbolName=Header-Male-2.54_1x1, Supplier=LCSC, Supplier Part=C81276
P3: Manufacturer=ReliaPro, Manufacturer Part=Header-Female-2.54_1x4, spicePre=P, spiceSymbolName=Header-Female-2.54_1x4, Supplier=LCSC, Supplier Part=C124413
Q1: library part CMP-20235-000001-1, "NPN TRANSISTOR 1.5A 40V SOT-23 R", Case/Package=TO-236-3, Collector Emitter Breakdown Voltage=25V, Collector Emitter Voltage (VCEO)=400mV, Max Collector Current=1.5A, Max Power Dissipation=300mW, Transition Frequency=100MHz, Max Breakdown Voltage=25V, Mount="Surface Mount", Packaging="Tape and Reel", RoHS Compliant=Yes
Q2: library part CMP-1048-00374-1, "General Purpose Transistor, PNP Silicon, 3-Pin SC70, Pb-Free, Tape and Reel", Manufacturer="On Semiconductor", ComponentLink1Description="Manufacturer URL", ComponentLink1URL=http://www.onsemi.com/, ComponentLink2Description=Datasheet, ComponentLink2URL=http://www.onsemi.cn/pub_link/Collateral/MMBT3904WT1-D.PDF, ComponentLink3Description="Package Specification", ComponentLink3URL=http://www.onsemi.cn/pub_link/Collateral/419-04.PDF, DatasheetVersion="Rev. 8", fT Min (MHz)=250, IC Continuous (A)=-0.2, Mounting Technology="Surface Mount", Note1=0, PackageDescription="3-Pin Small Outline Transistor, Body 2 x 1.25 mm, Pitch 0.65 mm", PackageReference=SC-70-3-419-04, PackageVersion="Rev. N, 11/2008", Packing="Tape and Reel", PartNumber=SMMBT3906WT1G, Polarity=PNP, RoHS=TRUE
R1 R2: library part CMP-2002-01013-2, "RES SMD 60.4 OHM 1% 1/10W 0402", Case Code (Imperial)=0402, Case Code (Metric)=1005, Max Operating Temperature=155°C, Max Power Dissipation=100mW, Min Operating Temperature=-55°C, Package Quantity=1, Resistance=60.4R, Resistance Tolerance=1%, Resistor Type="Thick Film", Temperature Coefficient=100ppm/°C, Voltage Rating=50V, Case/Package=0402, Construction=Rectangular, Contact Plating=Tin, Depth=0.5mm, Features="Automotive AEC-Q200", Height=0.016inch, Lead Free="Contains Lead", Length=1mm, Military Standard=Not, Mount="Surface Mount", Number of Terminations=2, Packaging="Tape and Reel", Power Rating=100mW, REACH SVHC="No SVHC", RoHS Compliant=Yes, Series=ERJ, Termination=SMD/SMT, Tolerance=1%, Voltage Rating (DC)=50V, Width=0.02inch
R3 R4: library part CMP-2002-08011-2, Case Code (Imperial)=0402, Max Operating Temperature=155°C, Max Power Dissipation=63mW, Min Operating Temperature=-55°C, Resistance=4.7kΩ, Temperature Coefficient=100ppm/°C, Tolerance=5%, Voltage Rating=50V, Case/Package=0402, Composition="Thick Film", Depth=500µm, Features="Moisture Resistant", Height=350µm, Lead Free="Lead Free", Length=1mm, Military Standard=Not, Number of Pins=2, Number of Terminations=2, Packaging="Tape & Reel", Power Rating=63mW, REACH SVHC="No SVHC", RoHS=Compliant, Schedule B="8533210045, 8533210045", Termination=SMD/SMT, Voltage Rating (AC)=50V, Voltage Rating (DC)=50V, Width=500µm
R5 R6 R11: library part CMP-1666-00003-5, "RES Thick Film, 1kΩ, 1%, 0.1W, 100ppm/°C, 0603", Case Code (Imperial)=0603, Case Code (Metric)=1608, Max Operating Temperature=155°C, Max Power Dissipation=100mW, Min Operating Temperature=-55°C, Package Quantity=10, Resistance=1kR, Temperature Coefficient=100ppm/°C, Tolerance=1%, Voltage Rating=75V, Case/Package=0603, Composition="Thick Film", Contact Plating=Tin, Depth=0.85mm, Features="Automotive AEC-Q200", Height=0.45mm, Lead Free="Lead Free", Length=1.55mm, Military Standard=Not, Mount="Surface Mount", Number of Pins=2, Number of Terminations=2, Packaging="Tape and Reel", Power Rating=100mW, Radiation Hardening=No, Termination=SMD/SMT, Voltage Rating (DC)=75V, Weight=7.1E-05oz, Width=0.033inch
R7 R8 R9: library part CMP-2002-07915-3, "RES 10K OHM 5% 1/16W 0402", Case Code (Imperial)=0402, Case Code (Metric)=1005, Max Operating Temperature=155°C, Max Power Dissipation=63mW, Min Operating Temperature=-55°C, Package Quantity=1, Power Rating=62.5mW, Resistance=10kR, Resistance Tolerance=5%, Resistor Type="Thick Film", Temperature Coefficient=100ppm/°C, Voltage Rating=50V, Case/Package=0402, Construction=Rectangular, Depth=0.5mm, Features="Moisture Resistant", Height=0.016inch, Lead Free="Lead Free", Length=0.039inch, Military Standard=Not, Number of Terminations=2, Packaging="Tape and Reel", RoHS Compliant=Yes, Series=RC, Size Code=0402, Termination=SMD/SMT, Tolerance=5%, Width=0.02inch
R10 R12: "Fixed Resistor, Metal Strip, 3W, 0.002ohm, 0.077V, 1% +/-Tol, 600ppm/Cel, Surface Mount, 4527", Case/Package=4527, Manufacturer="Vishay Dale", Max Operating Temperature=275°C, Min Operating Temperature=-65°C, Package Height=2.41mm, Package Length=11.56mm, Package Shape=Rectangular, Package Width=6.98mm, Power=3W, Rated Temperature=70°C, Resistor Type="FIXED RESISTOR", Supplier Part Number=WSRB-.002CT-ND, Temperature Coefficient (ppm/Cel)=-600,600, Tolerance=1%, Category="Chip SMD Resistors", ComponentLink1Description=https://datasheet.ciiva.com:443/pdfs/VipMasterIC/IC/VISH/VISH-S-A0007103483/VISH-S-A0007103483-1.pdf?src-supplier=IHS+Markit, ComponentLink1URL=https://datasheet.ciiva.com:443/pdfs/VipMasterIC/IC/VISH/VISH-S-A0007103483/VISH-S-A0007103483-1.pdf?src-supplier=IHS+Markit, ComponentLink2Description=https://datasheet.ciiva.com/11812/0900766b80d81e5e-11812948.pdf?src-supplier=Rs, ComponentLink2URL=https://datasheet.ciiva.com/11812/0900766b80d81e5e-11812948.pdf?src-supplier=Rs, ComponentLink3Description=https://datasheet.ciiva.com/2484/wsr-2484757.pdf?src-supplier=Digikey, ComponentLink3URL=https://datasheet.ciiva.com/2484/wsr-2484757.pdf?src-supplier=Digikey, ComponentLink4Description=https://datasheet.ciiva.com/2484/wsr-2484758.pdf?src-supplier=Digikey, ComponentLink4URL=https://datasheet.ciiva.com/2484/wsr-2484758.pdf?src-supplier=Digikey, ComponentLink5Description=https://datasheet.ciiva.com/2484/wsr-2484759.pdf?src-supplier=Digikey, ComponentLink5URL=https://datasheet.ciiva.com/2484/wsr-2484759.pdf?src-supplier=Digikey, ComponentLink6Description=https://datasheet.ciiva.com/16375/wsr-16375639.pdf?src-supplier=Future+Electronics, ComponentLink6URL=https://datasheet.ciiva.com/16375/wsr-16375639.pdf?src-supplier=Future+Electronics, Construction=Chip, JESD-609 Code=e2, Manufacturer Part Number=WSR32L000FEA, Mounting Technology="Surface Mount", Packaging="Tape and Reel", Pins=2, Pricing="1=1.54, 10=1.022, 25=0.906, 50=0.8386, 100=0.7852, 250=0.73096, 500=0.69258 (USD)", Reach SVHC Compliant=Yes, Reference Standard=AEC-Q200, RoHS=Yes, RoHS Compliant=Yes, Stock=1901, Supplier=Digikey, Technology="METAL STRIP", Terminal Finish=Tin, Termination=Wraparound
R13 R14 R15 R16: library part CMP-2000-06948-1, "Chip Resistor, 10 kOhm, +/- 1%, 0.1 W, -55 to 155 degC, 0603 (1608 Metric), RoHS, Tape and Reel", Case Style=Molded, Manufacturer=Yageo, Operating Temp Range=-55Cto155C, Package / Case=0603, Package Description="2-Pin Surface Mount Device, Body 1.6 x 0.8 mm", Power Rating(s)=1/10W, Resistance=10kohm, Temperature Coefficient=±100, Tolerance (+ or -)=1%, Construction=Rectangular, Datasheet URL=http://www.yageo.com/documents/recent/PYu-RC_Group_51_RoHS_L_7.pdf, Datasheet Version="Rev. 7, 05/2017", Failure Rate=NotRequired, Manufacturer URL=http://www.yageo.com/, Military Standard=NotRequired, Mounting Technology=SurfaceMount, Package Reference=0603, Packaging=TapeandReel, Product Depth (mm)=0.8mm, Product Height (mm)=0.45mm, Product Length (mm)=1.6mm, Termination Style=NotRequired, Type=ThickFilm
U1: library part CMP-04872-000119-1, "IC TRANSCEIVER 1/1 SOT23-8", Case/Package=SOT-23-8, Max Operating Temperature=125°C, Min Operating Temperature=-40°C, Data Rate=5Mbps, Lead Free="Lead Free", Mount="Surface Mount", Packaging="Tape and Reel", Receiver Hysteresis=120mV, RoHS Compliant=Yes
U2: library part CMP-12756-000028-1, "IC REG LINEAR 3.3V 800MA SOT223", Case/Package=SOT-223, Dropout Voltage=1.2V, Max Input Voltage=15V, Max Operating Temperature=125°C, Max Output Current=1.35A, Min Current Limit=1A, Min Operating Temperature=-20°C, Output Current=800mA, Output Voltage=3.3V, Package Quantity=4000, Power Supply Rejection Ratio (PSRR)=70dB, Quiescent Current=6mA, Reference Voltage=1.262V, Accuracy=1%, Height=1.7mm, Lead Free="Lead Free", Length=6.7mm, Mount="Surface Mount", Number of Outputs=1, Number of Pins=4, Number of Regulators=1, Output Type=Fixed, Packaging="Tape and Reel", Polarity=Positive, Width=3.7mm

## Via types
v1: diameter 24, hole 12, Top Layer to Bottom Layer, tented both sides, 26 vias

## Nets (pads, with @x,y where several pads share a name; then routed paths per layer and width w, separated by ;. In a path a pad name is that pad's centre, name@x,y a point inside that pad or via, vN(x,y) a via of type N, cw(c..) or ccw(c..) an arc to the next point about the centre after c; other vN are vias at no path point)
3V3: C2.2 C7.1 C11.1 C12.2 C13.2 C14.1 CS1.6 CS2.6 DS1.3 DS2.3 P3.1 Q2.2 R6.2 R7.1 R11.2 R13.2 R14.2 U1.3 U2.2 U2.4 | length 4927.4
  Top Layer w15: U1.3 5712.53,3723.9 5714.64,3726.01 5715.64,3725 5806,3725 v1(5807,3724)
  Top Layer w27.33: C13.2 C13.2@5236.86,2852.57 ; 5433.42,2849.27 C12.2
  Top Layer w30: DS2.3 5239.8,2849.62 5236.86,2852.57 5240.16,2849.27 5336.79,2849.27 ; R14.2 5337,1862.41 5337,2022 5470.51,2155.51 v1(5566.46,2155.51) ; 5344.49,3110.24 5344.49,3090.55 5336.79,3082.85 5336.79,2849.27 ; 5413.39,3031.5 R11.2 ; 5433.42,2849.27 5336.79,2849.27 ; C12.2@5452.76,2847.93 5452.76,2802.42 DS1.3 ; R13.2 6894.35,1628.17 6894.35,1786.08 v1(6899.61,1791.34)
  Bottom Layer w30: v1(5566.46,2155.51) 5636,2155.51 ; v1(5807,3724) 5807.33,3723.67 5807.33,3546.55 5634,3373.22 v1(5634,3210) 5634,2157.51 5636,2155.51 ; P3.1 6509.06,2160.46 6514,2155.51 ; v1(6899.61,1791.34) 6899.61,1941.39 6685.49,2155.51 6514,2155.51 ; 5636,2155.51 6514,2155.51
3V3_2: J4.3 R3.2 R4.2 | length 710.7
  Top Layer w30: v1(6549,3405) 6549.51,3405.51 R4.2 ; R3.2 6817.49,3405.51 v1(6818,3405)
  Bottom Layer w30: J4.3 6309.45,3405.51 6548.49,3405.51 v1(6549,3405) v1(6818,3405)
+5: C5.1 C15.1 J4.1 J6.1 P5.1 U2.3 | length 1666.2
  Top Layer w20: J4.1 C5.1@6011.02,3384.1
  Top Layer w30: P5.1 5119.21,3307.09 J4.1
  Bottom Layer w25: J4.1 6463.78,3759.84 J6.1
CAN_N: C4.2 D1.1 J1.2 J2.1 R1.1 U1.6 | length 684
  Top Layer w6: J2.1 4967.6,3766.1 5201.34,3766.1 5204.85,3762.59 5204.85,3762.12 5213.46,3753.5 D1.1 ; D1.1@5239.06,3753.5 5262.3,3776.75 C4.2 5433.45,3776.75 R1.1 ; R1.1@5434.33,3780.87 5434.56,3781.1 5464.33,3781.1 5474.33,3771.1 5474.33,3736.1 5486.54,3723.9 U1.6
CAN_P: C3.2 D1.2 J1.1 J2.2 R2.1 U1.7 | length 697.8
  Top Layer w6: J2.2 4957.6,3666.1 J1.1 5131.93,3678.7 D1.2 5239.06,3678.7 5272.95,3644.8 C3.2 5430.86,3644.8 R2.1 5434.56,3641.1 5464.33,3641.1 5474.33,3651.1 5474.33,3686.1 5486.54,3698.31 U1.7
GND: C1.1 C2.1 C3.1 C4.1 C5.2 C6.2 C7.2 C8.2 C9.1 C10.1 C11.2 C12.1 C13.1 C14.2 C15.2 CS1.2 CS2.2 D1.3 D2.1 DS1.1 DS2.1 J4.2 J6.2 J8.2 P1.1 P2.1 P3.4 Q1.2 R5.2 R15.1 R16.1 U1.2 U2.1 | length 990.4
  Top Layer w15: C10.1 5429.9,1939.9 v1(5445,1955) ; R16.1 5505,1865 v1(5520,1850) ; U1.2 C2.1@5707.78,3698.31 ; C2.1 5751.8,3696.2 5771.9,3676.1 v1(5774.33,3676.1)
  Top Layer w20: C13.1 5236.08,2883.71 5236.22,2883.86 5236.22,2907.8 5245.36,2916.94 v1(5245.36,2918.02) ; v1(5255,1805) C11.2 ; DS2.1 5354.16,2727.8 5354.16,2667.5 v1(5354.33,2667.32) ; C8.2 5384.95,1634.95 v1(5385,1605) v1(5385,1605) ; C8.2@5384.9,1635.7 5384.9,1683.88 5390,1688.98 CS1.2 ; v1(5433.07,2923.23) 5433.07,2922.15 5452.76,2902.46 5452.76,2893.93 ; DS1.1 5570.69,2727.8 5570.69,2657.65 v1(5570.87,2657.48) ; C5.2 v1(6010,3436) ; v1(6715,1560) 6715,1561.08 6733.19,1579.27 6733.19,1608.19 R15.1 ; v1(6795,1875) 6795,1873.92 6805.54,1863.38 C6.2@6805.54,1840.7 ; C9.1 6805.55,1535.1 6824.89,1515.77 6839.23,1515.77 v1(6840,1515) ; CS2.2 6805,1838.76 6805.69,1839.45 C6.2 ; C7.2 6925.49,1665.55 6925.64,1665.7 6949.62,1665.7 6963.92,1680 v1(6965,1680)
  Top Layer w20.29: C12.1 5452.76,2893.93
  Top Layer w50: D2.1 v1(5590.55,2874.02) ; v1(5531.5,3080.71) 5531.5,3120.96 U2.1
  other v1: 5304.33,3681.1 5354.33,3686.1 5299.33,3731.1 5344.33,3736.1
GPIO1: J4.4 U1.1 | length 851.1
  Top Layer w10: U1.1 5632.76,3672.72 5637.51,3667.97 5637.51,3653.83 5659.45,3631.89 5986.22,3631.89 J4.4
GPIO2: J4.5 U1.4 | length 1047.5
  Top Layer w10: U1.4 6093.03,3749.49 6411.02,3431.5 J4.5
GPIO3: J4.6
GPIO4: J3.2 J4.7 R4.1 | length 506.4
  Top Layer w10: J4.7 6612.6,3308.66 6612.6,3403.94 R4.1 6614.17,3631.89 6692.91,3710.63 J3.2@6692.91,3779.53
GPIO5: J3.1 J4.8 R3.1 | length 544.5
  Top Layer w10: J4.8 6711.02,3374.41 R3.1 ; R3.1@6742.13,3407.48 6889.76,3555.12 J3.1@6889.76,3779.53
GPIO6: DS1.2 J4.9 | length 1451
  Top Layer w10: DS1.2 6302.78,2798.84 J4.9
GPIO7: J5.9
GPIO8: C6.1 CS2.1 J5.8 | length 883.1
  Top Layer w10: J5.8 6711.02,2078.35 6835.49,1953.88 C6.1 ; C6.1@6836.34,1840 6836.34,1775.47 CS2.1
GPIO9: J5.7
GPIO10: J5.6
GPIO11: J5.5 P3.2 | length 266.6
  Top Layer w10: P3.2 6410.04,2333.66 6410.04,2597.44 J5.5
GPIO12: J5.4 P3.3 R8.2 R9.2 | length 266.6
  Top Layer w10: P3.3 6310.04,2333.66 6310.04,2597.44 J5.4
GPIO13: C8.1 CS1.1 J5.3 | length 1830.3
  Top Layer w10: C8.1@5355.1,1635.7 5355.1,1686.48 5352.6,1688.98 CS1.1 5240.16,1698.82 5177.17,1761.81 5177.17,1988.19 5531.5,2342.52 6043.31,2342.52 6211.02,2510.24 J5.3
IN+: CS1.4 CS2.3 J7.2 R10.2 R12.2 | length 1612.2
  Top Layer w25: CS1.4 5696.18,1801.18 5710,1815 5710,1918.66 R10.2 5723.66,1905 J7.2 6511.34,1905 R12.2 6525,1790 6545.59,1769.41 CS2.3
IN-: CS1.3 CS2.4 J7.1 R10.1 R12.1 | length 1627.6
  Top Layer w25: CS1.3 5691.18,1698.82 5705,1685 R10.1 5720.66,1572 6017,1572 J7.1 6084.74,1570.26 6506.08,1570.26 R12.1 6525,1655.95 6539.64,1670.59 CS2.4
NetC1_2: C1.2 R1.2 R2.2 | length 93.9
  Top Layer w6: C1.2 5426.83,3716.1 5434.33,3708.6 ; R2.2 5434.33,3708.6 ; R1.2 5434.33,3708.6
NetC9_2: C9.2 CS2.5 R13.1 R15.2 | length 145.3
  Top Layer w25: R15.2 6805.59,1610 ; C9.2 6805,1610.59 ; CS2.5 6805,1610.59 ; R13.1 6805.59,1610 ; 6805,1610.59 6805.59,1610
NetC10_2: C10.2 CS1.5 R14.1 R16.2 | length 155.7
  Top Layer w15: R14.1@5385.59,1861.06 5390,1856.65 CS1.5 ; R14.1 R16.2 5420.1,1869.31 5420.1,1889.15 5400,1909.25 C10.2
NetD2_2: D2.2 R11.1 | length 39.4
  Top Layer w30: D2.2 R11.1
NetD3_1: D3.1 R5.1
NetD3_2: D3.2 Q2.3
NetD4_1: D4.1 Q1.3 R7.2
NetD4_2: D4.2 R6.1
NetDS1_4: DS1.4 DS2.2 | length 157.1
  Top Layer w10: DS2.2 5357.55,2795.28 5393.7,2795.28 5403.54,2785.43 5403.54,2742.08 5409.4,2736.22 5448.09,2736.22 DS1.4
NetJ8_S1: J8.S1 J8.S2
NetQ1_1: Q1.1 R8.1
NetQ2_1: Q2.1 R9.1
RX: J5.2
TX: J5.1
VIN: J8.1 P4.1
pads on no net: DS2.4 U1.5 U1.8

## Polygon pours and split planes (outlines as drawn)
3V3 on Top Layer "NONET_L-01_P-001" (solid, pour order 5): 5246.06,3277.56 5472.44,3277.56 5472.44,3248.03 5649.61,3248.03 5649.61,3159.45 5482.28,3159.45 5482.28,3001.97 5246.06,3001.97
NetC10_2 on Top Layer "NONET_L-01_P-001" (solid, pour order 2): 5374,1920 5374,1800 5410,1800 5410,1840 5440,1840 5450,1850 5450,1920
3V3 on Top Layer "NONET_L-01_P-001" (solid, pour order 4): 5310,1875 5310,1770 5370,1770 5370,1875
3V3 on Top Layer "NONET_L-01_P-001" (solid, pour order 3): 6830,1700 6830,1640 6860,1640 6860,1590 6910,1590 6910,1700
NetC1_2 on Top Layer "NONET_L-01_P-001" (solid, pour order 0): 5449.33,3666.1 5449.33,3751.1 5384.33,3751.1 5384.33,3666.1
GND on Top Layer "NONET_L-01_P-001" (solid, pour order 1): 5369.33,3666.1 5369.33,3756.1 5279.33,3756.1 5279.33,3666.1
GND on Layer 1 (split plane): 6987.78,1437.42 4272.07,1437.42 4272.07,3916.91 6987.78,3916.91
GND on Layer 2 (split plane): 6987.78,1437.42 4272.07,1437.42 4272.07,3916.91 6987.78,3916.91